# EAGLE board Zio Qwiic 1.5in. OLED Display (EAGLE 9.6.2)
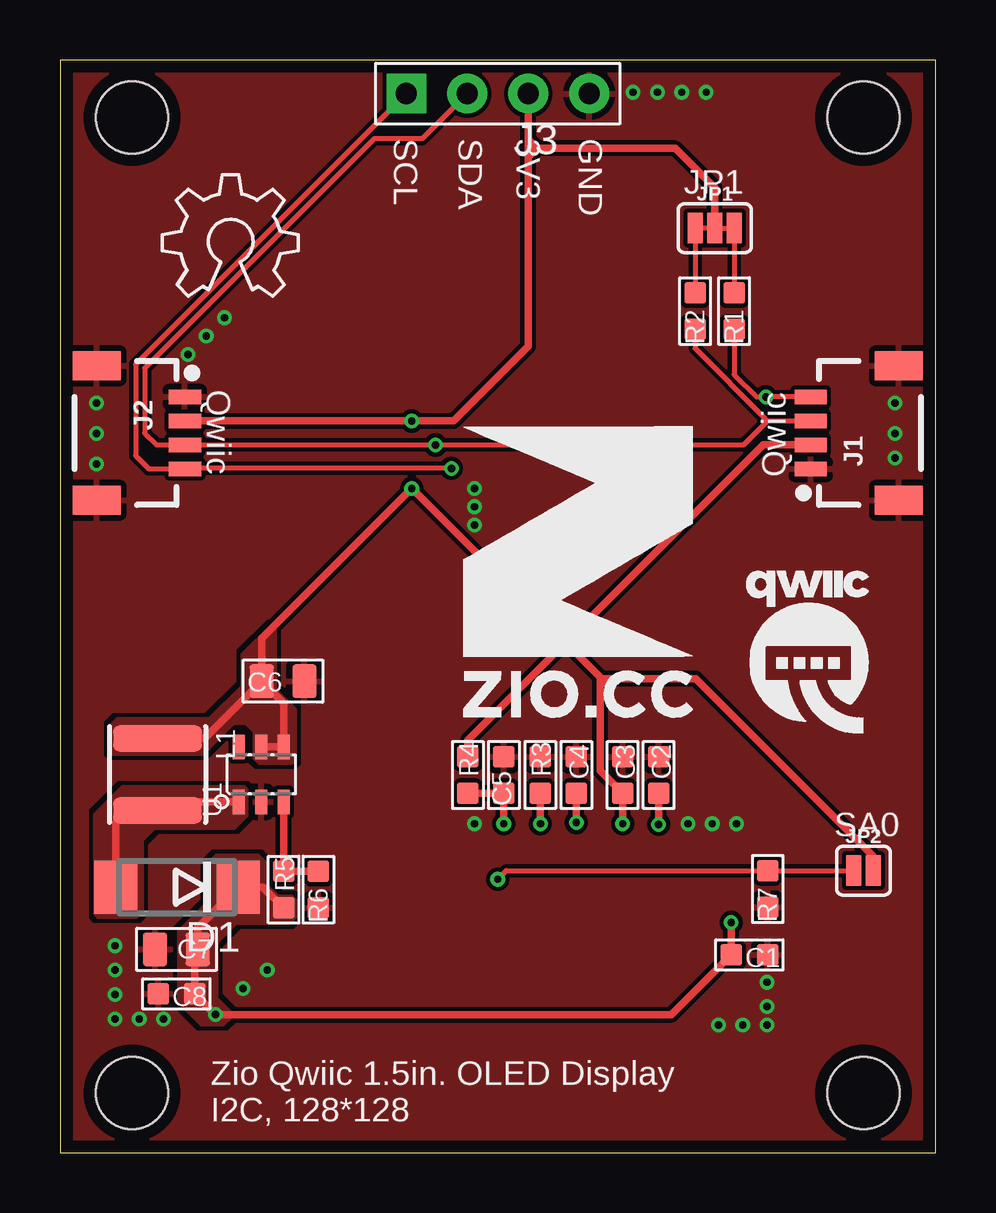
[diagram p0: board, top side]
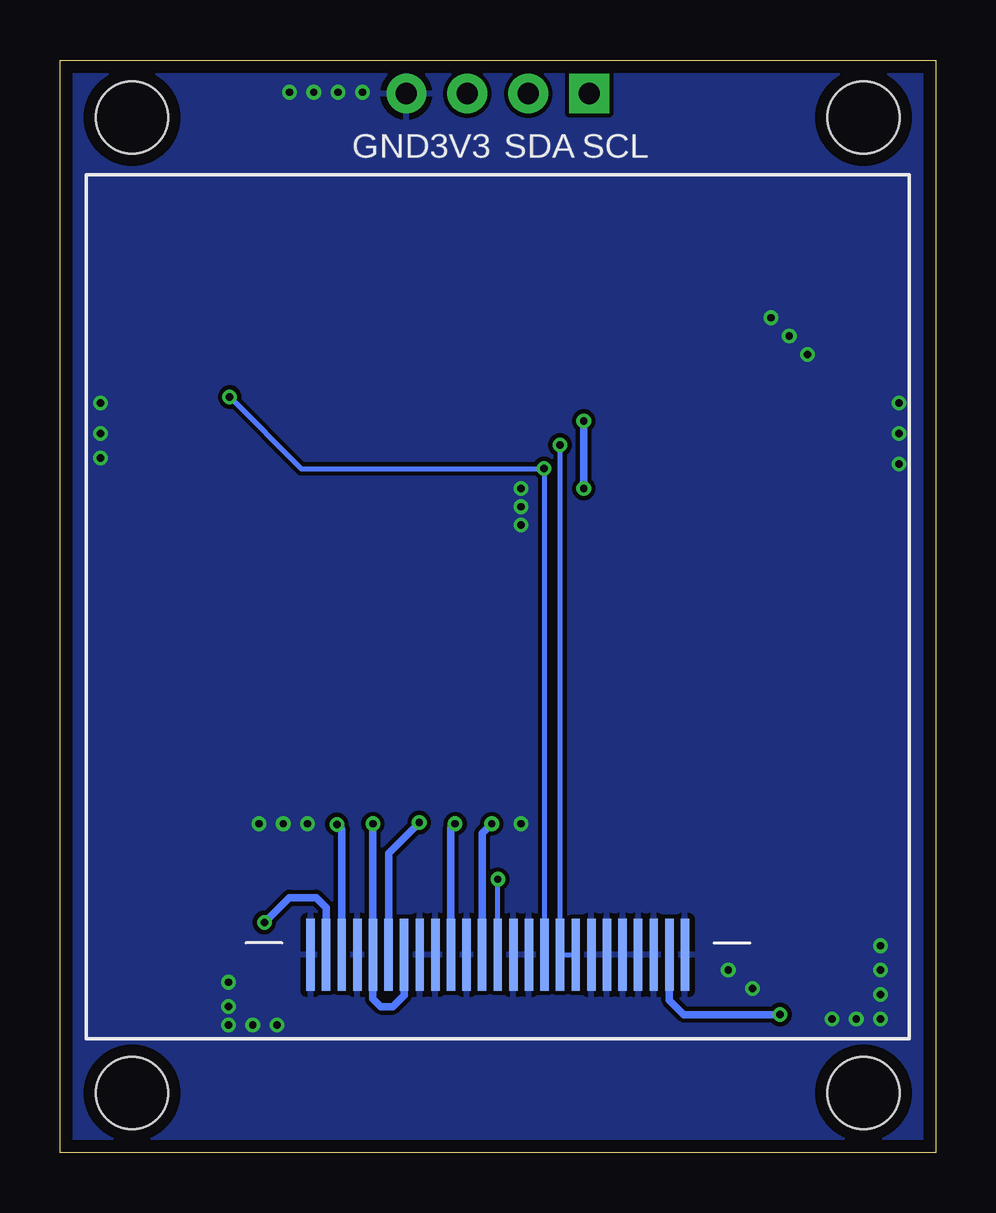
[diagram p1: board, bottom side, seen from below]

Size 36.48 x 45.54 mm. Coordinates in mm from the lower left corner, seen from the top.
Outline: 0,0 36.48,0 36.48,45.54 0,45.54 0,0
Copper layers (1*16): Top 0.035mm / dielectric 1.5mm / Bottom 0.035mm
Design rules "NOA Eagle Rule": minimum track width 7mil, minimum drill 12mil, track to track 7mil, track to pad 7mil, pad to pad 7mil, via to via 7mil, smd to smd 0mil, copper to edge 20mil, drill to drill 10mil, minimum pad ring 10mil, minimum via ring 6mil, stop-mask expansion 2mil, vias tented up to drill 25mil, thermal gap 10mil
Holes 3 mm at 3,2.5 33.48,2.5 3,43.14 33.48,43.14

## Footprints (pad centres in the part's own frame; a part is rotated, then mirrored left to right if it is on the bottom)
C0603 = smd 0.889 x 0.889: 1 -0.762,0; 2 0.762,0
C0805 = smd 1.016 x 1.397: 1 -0.889,0; 2 0.889,0
DO-214AC = smd 1.8 x 2.2: A 2.55,0; C -2.55,0
JST-SH-4P = smd 0.6 x 1.35: 1 1.5,0; 2 0.5,0; 3 -0.5,0; 4 -1.5,0 | smd 1.2 x 2: NC1 -2.8,3.675; NC2 2.8,3.675
4P-65/35MIL = drill 0.889 pad 1.651 square: 1 0,3.81 | drill 0.889 pad 1.651: 2 0,1.27; 3 0,-1.27; 4 0,-3.81
SMT-JUMPER_3_2-NC_TRACE = smd 0.635 x 1.27: 1 -0.813,0; 2 0,0; 3 0.813,0
SMT-JUMPER_2_NC_PASTE_SILK_NOCREM = smd 0.635 x 1.27: 1 -0.406,0; 2 0.406,0
L4030 = smd 1.1 x 3.7: 1 -1.5,0; 2 1.5,0
OLED_MODULE_1.5IN_128*128 = smd 3 x 0.35: 1 0,7.8; 2 0,7.15; 3 0,6.5; 4 0,5.85; 5 0,5.2; 6 0,4.55; 7 0,3.9; 8 0,3.25; 9 0,2.6; 10 0,1.95; 11 0,1.3; 12 0,0.65; 13 0,0; 14 0,-0.65; 15 0,-1.3; 16 0,-1.95; 17 0,-2.6; 18 0,-3.25; 19 0,-3.9; 20 0,-4.55; 21 0,-5.2; 22 0,-5.85; 23 0,-6.5; 24 0,-7.15; 25 0,-7.8
R0603 = smd 0.889 x 0.889: 1 -0.762,0; 2 0.762,0
SOT23-6 = smd 0.508 x 1.016: 1 -0.94,-1.143; 2 0,-1.143; 3 0.94,-1.143; 4 0.94,1.143; 5 0,1.143; 6 -0.94,1.143

## Placement (x,y rotation side)
C1  4.7uF ±10% 25V  [C0603]  28.73,8.26 180 top
C2  4.7uF ±10% 25V  [C0603]  24.94,15.75 270 top
C3  100nF ±10% 50V  [C0603]  23.44,15.75 270 top
C4  100nF ±10% 50V  [C0603]  21.51,15.75 270 top
C5  100nF ±10% 50V  [C0603]  18.49,15.75 90 top
C6  22uF ±20% 25V  [C0805]  9.3,19.66 0 top
C7  22uF ±20% 25V  [C0805]  4.85,8.48 180 top
C8  100nF ±10% 50V  [C0603]  4.85,6.63 180 top
D1  SS14  [DO-214AC]  4.88,11.07 180 top
J1  JST-SH-4P-1.0  [JST-SH-4P]  31.28,30 270 top
J2  JST-SH-4P-1.0  [JST-SH-4P]  5.2,30 90 top
J3  [4P-65/35MIL]  18.24,44.14 90 top
JP1  SMT-JUMPER_3_2-NC_TRACE  [SMT-JUMPER_3_2-NC_TRACE]  27.28,38.53 0 top
JP2  JUMPER-SMT_2_NC_PASTE_NOCREM  [SMT-JUMPER_2_NC_PASTE_SILK_NOCREM]  33.48,11.76 0 top
L1  PRS4018-4R7MT  [L4030]  4.06,15.77 270 top
OLED1  OLED_MODULE_1.5IN_128128  [OLED_MODULE_1.5IN_128*128]  18.24,8.25 90 bottom
R1  4.7K ±1%  [R0603]  28.09,35.08 90 top
R2  4.7K ±1%  [R0603]  26.47,35.08 90 top
R3  1.2M ±1%  [R0603]  20.02,15.75 270 top
R4  10K ±1%  [R0603]  16.99,15.75 270 top
R5  240K ±1%  [R0603]  9.32,10.97 270 top
R6  10K ±1%  [R0603]  10.77,10.97 90 top
R7  10K ±1%  [R0603]  29.49,11 90 top
U1  SX1308  [SOT23-6]  8.38,15.77 0 top
U$4  [12MM]  16.71,18.08 0 top
U$5  [QWIIC-LOGO-MEDIUM]  31.14,20.93 0 top
U$6  [OSHW_6X200_NOTEXT]  4.27,35.69 0 top

## Library data of the parts
C1-C8 R1-R7 = RCL
D1 = Discrete_NOA
J1 J2 = Connector
J3 = Connector_NOA
JP1 JP2 = NOA-Jumpers
L1 = Discrete
OLED1 = Discretex
U1 = IC
U$4 = ZIO_silkscreen_package
U$5 = Z_silkscreen_package
U$6 = Logo_OSHW

## Nets
+3V3: C3.2 C6.1 J1.2 J2.2 J3.3 JP1.2 JP2.2 L1.1 OLED1.5 OLED1.7 R4.1 U1.4 U1.5
GND: C1.1 C2.1 C3.1 C4.1 C5.2 C6.2 C7.2 C8.2 J1.1 J1.NC1 J1.NC2 J2.1 J2.NC1 J2.NC2 J3.4 OLED1.1 OLED1.4 OLED1.8 OLED1.9 OLED1.11 OLED1.14 OLED1.15 OLED1.19 OLED1.20 OLED1.21 OLED1.22 OLED1.23 OLED1.25 R3.1 R6.1 R7.1 U1.2
N$6: JP1.3 R1.2
N$7: R5.1 R6.2 U1.3
N$8: JP1.1 R2.2
N$16: C5.1 OLED1.12 R4.2
N$18: OLED1.10 R3.2
N$22: C4.2 OLED1.6
N$25: C2.2 OLED1.3
SA0: JP2.1 OLED1.13 R7.2
SCL: J1.4 J2.4 J3.1 OLED1.16 R1.1
SDA: J1.3 J2.3 J3.2 OLED1.17 OLED1.18 R2.1
SW: D1.A L1.2 U1.1
VPP: C1.2 C7.1 C8.1 D1.C OLED1.2 OLED1.24 R5.2

## Tracks (layer width: path | path; a pad name or v marks a point on that pad's centre or on a via)
+3V3  (via drill 0.3)
  Top 0.305: C6.1 9.32,18.75 U1.4 U1.5 | C6.1 6.02,17.27 L1.1 | JP1.2 27.28,40.21 25.63,41.86 19.89,41.86 | J2.2 v14.66,30.5 16.4,30.5 19.51,33.61 19.51,41.48 | 19.51,41.48 19.51,42.24 | 19.51,42.24 J3.3 | 19.89,41.86 19.51,41.48 | 19.89,41.86 19.51,42.24 | J1.2 29.3,29.5 21.3,21.5 | R4.1 16.99,17.2 20.8,21.01 | 21.3,21.5 21.27,21.48 | 21.27,21.48 20.84,21.04 | C6.1 8.41,21.44 v14.66,27.69 20.8,21.54 | 20.8,21.54 20.8,21.01 | 20.8,21.54 20.84,21.5 21.3,21.5 | 21.27,21.04 21.27,21.48 | 22.5,19.48 22.5,15.93 C3.2 v23.44,13.72 | 22.5,19.48 22.5,19.76 | 22.5,19.76 22.5,19.81 21.27,21.04 | 21.27,21.04 20.84,21.04 | 20.84,21.04 20.8,21.01 | 22.78,19.76 26.49,19.76 33.88,12.37 JP2.2 | 22.78,19.76 22.5,19.76 | 22.5,19.48 22.78,19.76
  Bottom 0.305: v14.66,27.69 v14.66,30.5 | v23.44,13.72 v23.44,13.71 OLED1.5 23.44,6.42 23.11,6.1 22.61,6.1 22.14,6.56 OLED1.7
  pour Top (no thermals): 7.59,20.78 7.59,19.46 6.22,18.08 2.39,18.08 2.08,17.78 2.08,16.74 2.21,16.61 5.94,16.61 6.32,16.99 7.24,17.91 7.75,17.91 8.1,17.55 8.1,16.81 8.1,16.43 8.2,16.33 8.31,16.23 9.6,16.23 9.65,16.23 9.8,16.38 9.8,18.49 8.97,19.33 8.97,21.89 8.86,22 8.81,22
GND  (via drill 0.3)
  other vias: 1.52,31.24 1.52,29.97 1.52,28.7 5.33,33.27 6.1,34.04 6.86,34.8 34.8,31.24 34.8,29.97 34.8,28.96 17.27,27.69 17.27,26.92 17.27,26.16 2.29,8.64 2.29,7.62 2.29,6.6 2.29,5.59 3.3,5.59 4.32,5.59 29.46,7.11 29.46,6.1 29.46,5.33 28.45,5.33 27.43,5.33 26.16,13.72 27.18,13.72 28.19,13.72 17.27,13.72 7.62,6.86 8.64,7.62 23.88,44.2 24.89,44.2 25.91,44.2 26.92,44.2
  pour Top (rank 2): 0,45.54 36.47,45.54 36.47,0 0,0
  pour Bottom (rank 2): 0,45.54 36.47,45.54 36.47,0 0,0
N$6
  Top 0.203: JP1.3 R1.2
N$7
  Top 0.305: R6.2 R5.1 U1.3
N$8
  Top 0.203: JP1.1 R2.2
N$16  (via drill 0.3)
  Top 0.305: v18.49,13.72 C5.1 R4.2
  Bottom 0.305: OLED1.12 18.89,13.32 v18.49,13.72
N$18  (via drill 0.3)
  Top 0.305: v20.02,13.72 R3.2
  Bottom 0.305: OLED1.10 20.19,13.54 v20.02,13.72
N$22  (via drill 0.3)
  Top 0.305: v21.51,13.77 C4.2
  Bottom 0.305: OLED1.6 22.79,12.49 v21.51,13.77
N$25  (via drill 0.3)
  Top 0.305: C2.2 24.92,14.96 24.94,14.94 v24.94,13.69
  Bottom 0.305: OLED1.3 24.74,13.49 v24.94,13.69
SA0  (via drill 0.3)
  Top 0.203: v18.24,11.4 18.59,11.76 R7.2 JP2.1
  Bottom 0.203: OLED1.13 v18.24,11.4
SCL  (via drill 0.3)
  Top 0.203: R1.1 28.09,32.44 29.03,31.5 v29.41,31.5 J1.4 | J3.1 3.15,32.86 3.15,29.06 3.71,28.5 J2.4 5.22,28.52 v16.31,28.52
  Bottom 0.203: OLED1.16 16.29,28.51 | 16.29,28.51 v16.31,28.52 | v29.41,31.5 26.42,28.51 16.29,28.51
SDA  (via drill 0.3)
  Top 0.203: R2.1 26.47,33.52 29.35,30.64 | 29.49,30.5 J1.3 | 29.35,30.64 29.49,30.5 | J3.2 15.1,42.27 13.09,42.27 3.53,32.7 3.53,30 4.03,29.5 J2.3 v15.65,29.5 28.49,29.5 29.35,30.36 | 29.35,30.36 29.49,30.5 | 29.35,30.36 29.35,30.64
  Bottom 0.203: v15.65,29.5 v15.64,29.49 OLED1.17 OLED1.18
SW
  Top 0.305: U1.1 4.42,14.63 L1.2 4.04,14.3 2.85,14.3 2.33,13.78 D1.A
  pour Top (no thermals): 7.67,15.27 2.59,15.27 1.45,14.12 1.45,9.96 1.57,9.83 3.17,9.83 3.43,10.08 3.43,13.03 3.94,13.54 7.26,13.54 7.7,13.97 7.77,14.05 7.77,15.06 7.77,15.16
VPP  (via drill 0.3)
  Top 0.305: R5.2 8.46,11.07 D1.C 5.74,9.39 C7.1 5.61,8.36 C8.1 v6.48,5.77 25.48,5.77 C1.2 v27.96,9.6
  Bottom 0.305: v6.48,5.77 10.49,5.77 11.09,6.37 OLED1.24 | v27.96,9.6 26.92,10.64 25.81,10.64 25.39,10.23 OLED1.2
  pour Top (no thermals): 9.5,10.69 9.09,10.69 8.56,11.23 8.56,12.09 8.36,12.29 8.26,12.4 6.5,12.4 6.1,11.99 6.1,10.39 4.95,9.25 4.95,6.53 4.95,6.27 5.89,5.33 6.81,5.33 7.14,5.66 7.14,5.84 6.53,6.45 6.53,8.76 7.34,9.58 9.55,9.58 9.86,9.88 9.86,10.49 9.65,10.69

## Text on the board
tPlace: SCL | SDA | 3V3 | GND | JP1 | Qwiic | Qwiic | SA0 | Zio Qwiic 1.5in. OLED Display / I2C, 128*128
bPlace: SCL | SDA | 3V3 | GND